# Altium PCB demo_board_routed_DDR.PcbDoc (part 2 of 2)
Units mil, origin at the board's own origin, x right, y up, seen from the top; angles counter-clockwise.
Board outline 6000 x 4000 mil, 4 copper layers (L1, L2, L3, L4), stack 64.6 mil thick; 2 components, 43 nets, 316 pads, 106 vias.
Unrouted connection lines stored in the file: 5.
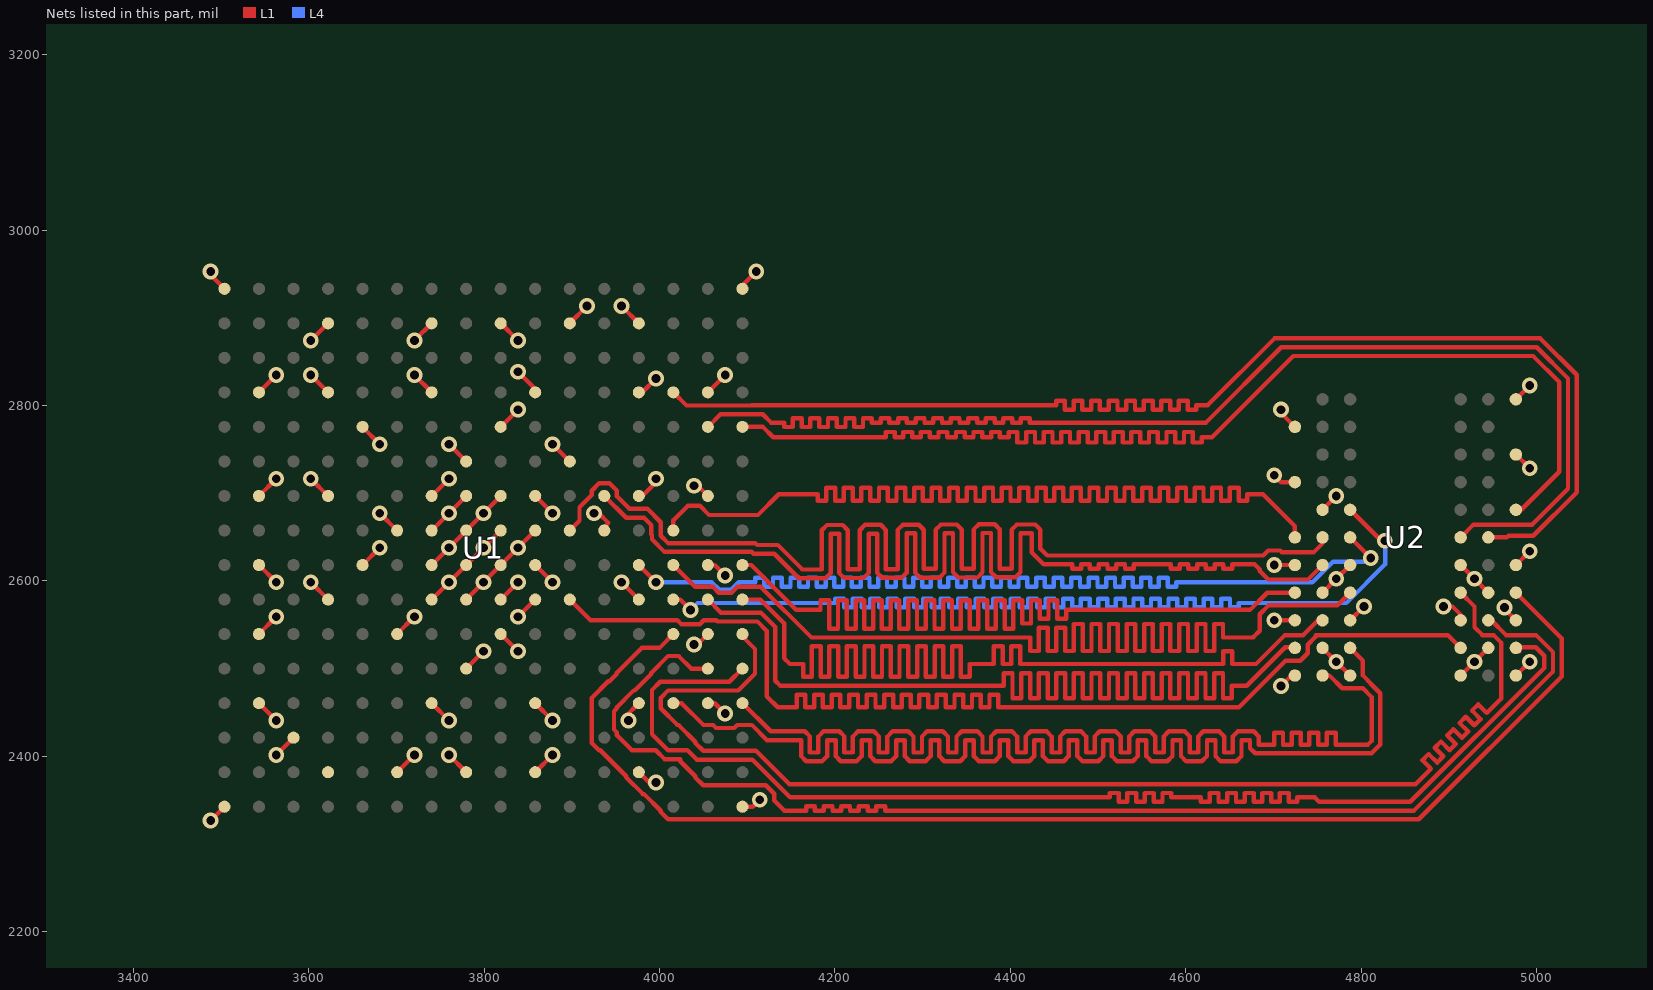
[diagram p4: the nets of this part, all layers, seen from the top]

## Via types
v1: diameter 18, hole 10, L1 to L4, 106 vias

## Nets (pads, with @x,y where several pads share a name; then routed paths per layer and width w, separated by ;. In a path a pad name is that pad's centre, name@x,y a point inside that pad or via, vN(x,y) a via of type N, cw(c..) or ccw(c..) an arc to the next point about the centre after c; other vN are vias at no path point) (continued)
BA2: U1.E16 U2.G1 | length 1504.4
  L1 w5: U1.E16@4094.49,2775.59 4117.82,2775.59 4129.63,2763.78 4243.11,2763.78 4248.03,2763.78 4258.03,2763.78 4258.03,2769.78 4268.03,2769.78 4268.03,2763.78 4278.03,2763.78 4278.03,2769.78 4288.03,2769.78 4288.03,2763.78 4298.03,2763.78 4298.03,2769.78 4308.03,2769.78 4308.03,2763.78 4318.03,2763.78 4318.03,2769.78 4328.03,2769.78 4328.03,2763.78 4338.03,2763.78 4338.03,2769.78 4348.03,2769.78 4348.03,2763.78 4358.03,2763.78 4358.03,2769.78 4368.03,2769.78 4368.03,2763.78 4378.03,2763.78 4378.03,2769.78 4388.03,2769.78 4388.03,2763.78 4398.03,2763.78 4398.03,2769.78 4408.03,2769.78 4408.03,2763.78 4408.03,2757.78 4418.03,2757.78 4418.03,2763.78 4418.03,2769.78 4428.03,2769.78 4428.03,2763.78 4428.03,2757.78 4438.03,2757.78 4438.03,2763.78 4438.03,2769.78 4448.03,2769.78 4448.03,2763.78 4448.03,2757.78 4458.03,2757.78 4458.03,2763.78 4458.03,2769.78 4468.03,2769.78 4468.03,2763.78 4468.03,2757.78 4478.03,2757.78 4478.03,2763.78 4478.03,2769.78 4488.03,2769.78 4488.03,2763.78 4488.03,2757.78 4498.03,2757.78 4498.03,2763.78 4498.03,2769.78 4508.03,2769.78 4508.03,2763.78 4508.03,2757.78 4518.03,2757.78 4518.03,2763.78 4518.03,2769.78 4528.03,2769.78 4528.03,2763.78 4528.03,2757.78 4538.03,2757.78 4538.03,2763.78 4538.03,2769.78 4548.03,2769.78 4548.03,2763.78 4548.03,2757.78 4558.03,2757.78 4558.03,2763.78 4558.03,2769.78 4568.03,2769.78 4568.03,2763.78 4568.03,2757.78 4578.03,2757.78 4578.03,2763.78 4578.03,2769.78 4588.03,2769.78 4588.03,2763.78 4588.03,2757.78 4598.03,2757.78 4598.03,2763.78 4598.03,2769.78 4608.03,2769.78 4608.03,2763.78 4608.03,2757.78 4618.03,2757.78 4618.03,2763.78 4623.03,2763.78 4629.92,2763.78 4722.6,2856.46 4995.98,2856.46 5025.75,2826.69 5025.75,2724.49 4982.36,2681.1 U2.G1@4976.38,2681.1
CAS#: U1.K14 U2.G7 | length 1379.2
  L1 w5: U1.K14@4015.75,2578.74 4023.61,2578.74 v1(4035.43,2566.92) ; U2.G7@4787.4,2681.1 4822.84,2645.66 v1(4826.76,2645.66)
  L4 w5: v1(4035.43,2566.92) 4043.3,2574.8 4126.97,2574.8 4200.35,2574.8 4200.35,2579.8 4210.35,2579.8 4210.35,2574.8 4210.35,2569.8 4220.35,2569.8 4220.35,2574.8 4220.35,2579.8 4230.35,2579.8 4230.35,2574.8 4230.35,2569.8 4240.35,2569.8 4240.35,2574.8 4240.35,2579.8 4250.35,2579.8 4250.35,2574.8 4250.35,2569.8 4260.35,2569.8 4260.35,2574.8 4260.35,2579.8 4270.35,2579.8 4270.35,2574.8 4270.35,2569.8 4280.35,2569.8 4280.35,2574.8 4280.35,2579.8 4290.35,2579.8 4290.35,2574.8 4290.35,2569.8 4300.35,2569.8 4300.35,2574.8 4300.35,2579.8 4310.35,2579.8 4310.35,2574.8 4310.35,2569.8 4320.35,2569.8 4320.35,2574.8 4320.35,2579.8 4330.35,2579.8 4330.35,2574.8 4330.35,2569.8 4340.35,2569.8 4340.35,2574.8 4340.35,2579.8 4350.35,2579.8 4350.35,2574.8 4350.35,2569.8 4360.35,2569.8 4360.35,2574.8 4360.35,2579.8 4370.35,2579.8 4370.35,2574.8 4370.35,2569.8 4380.35,2569.8 4380.35,2574.8 4380.35,2579.8 4390.35,2579.8 4390.35,2574.8 4390.35,2569.8 4400.35,2569.8 4400.35,2574.8 4400.35,2579.8 4410.35,2579.8 4410.35,2574.8 4410.35,2569.8 4420.35,2569.8 4420.35,2574.8 4420.35,2579.8 4430.35,2579.8 4430.35,2574.8 4430.35,2569.8 4440.35,2569.8 4440.35,2574.8 4440.35,2579.8 4450.35,2579.8 4450.35,2574.8 4450.35,2569.8 4460.35,2569.8 4460.35,2574.8 4460.35,2579.8 4470.35,2579.8 4470.35,2574.8 4470.35,2569.8 4480.35,2569.8 4480.35,2574.8 4480.35,2579.8 4490.35,2579.8 4490.35,2574.8 4490.35,2569.8 4500.35,2569.8 4500.35,2574.8 4500.35,2579.8 4510.35,2579.8 4510.35,2574.8 4510.35,2569.8 4520.35,2569.8 4520.35,2574.8 4520.35,2579.8 4530.35,2579.8 4530.35,2574.8 4530.35,2569.8 4540.35,2569.8 4540.35,2574.8 4540.35,2579.8 4550.35,2579.8 4550.35,2574.8 4550.35,2569.8 4560.35,2569.8 4560.35,2574.8 4560.35,2579.8 4570.35,2579.8 4570.35,2574.8 4570.35,2569.8 4580.35,2569.8 4580.35,2574.8 4580.35,2579.8 4590.35,2579.8 4590.35,2574.8 4590.35,2569.8 4600.35,2569.8 4600.35,2574.8 4600.35,2579.8 4610.35,2579.8 4610.35,2574.8 4610.35,2569.8 4620.35,2569.8 4620.35,2574.8 4620.35,2579.8 4630.35,2579.8 4630.35,2574.8 4630.35,2569.8 4640.35,2569.8 4640.35,2574.8 4640.35,2579.8 4650.35,2579.8 4650.35,2574.8 4650.35,2569.8 4660.35,2569.8 4660.35,2574.8 4665.35,2574.8 4783.17,2574.8 4827.51,2619.14 4827.51,2644.91 v1(4826.76,2645.66)
CK_N: U1.H11 U2.F8 | length 1505.1
  L1 w5: U1.H11@3897.64,2657.48 3908.7,2668.54 3908.7,2684 3922.62,2697.92 3922.62,2702.81 3931.05,2711.24 3942.97,2711.24 3951.4,2702.81 3951.4,2696.6 3965.54,2682.46 3985.89,2682.46 4001.36,2666.99 4001.36,2651.52 4009.79,2643.09 4109.15,2643.09 4111.27,2640.97 4134.94,2640.97 4162.86,2613.05 4185.04,2613.05 4185.04,2657.48 ; 4184.83,2657.69 4190.9,2663.75 4208.87,2663.75 4214.72,2657.89 4214.72,2613.26 4228.35,2613.26 4228.35,2657.69 ; 4228.14,2657.89 4234.2,2663.95 4252.17,2663.95 4258.03,2658.1 4258.03,2613.46 4271.65,2613.46 4271.65,2657.89 ; 4271.45,2658.1 4277.51,2664.16 4295.48,2664.16 4301.34,2658.3 4301.34,2613.67 4314.96,2613.67 4314.96,2658.1 ; 4314.76,2658.3 4320.82,2664.36 4338.79,2664.36 4344.65,2658.51 4344.65,2613.87 4358.27,2613.87 4358.27,2658.3 ; 4358.06,2658.51 4364.13,2664.57 4382.09,2664.57 4387.95,2658.71 4387.95,2614.08 4401.57,2614.08 4401.57,2658.5 4407.43,2664.36 4428.35,2664.36 4434.21,2658.51 4434.21,2636.81 4442.05,2628.97 4688.32,2628.97 4693.95,2634.61 4707.62,2634.61 4709.36,2632.87 4746.06,2632.87 4755.91,2642.72 U2.F8@4755.91,2649.61
CK_P: U1.G12 U2.E8 | length 1506.7
  L1 w5: U1.G12@3937.01,2696.85 3961.99,2671.87 3982.34,2671.87 3990.77,2663.44 3990.77,2653.11 3991.36,2652.52 3991.36,2647.38 4005.65,2633.09 4105.01,2633.09 4107.13,2630.97 4130.8,2630.97 4158.72,2603.05 4189.18,2603.05 4195.04,2608.91 4195.04,2653.54 ; 4195.04,2653.75 4204.72,2653.75 4204.72,2609.11 4210.58,2603.26 4232.49,2603.26 4238.35,2609.11 4238.35,2653.75 ; 4238.35,2653.95 4248.03,2653.95 4248.03,2609.32 4253.89,2603.46 4275.8,2603.46 4281.65,2609.32 4281.65,2653.95 ; 4281.65,2654.16 4291.34,2654.16 4291.34,2609.52 4297.2,2603.67 4319.1,2603.67 4324.96,2609.52 4324.96,2654.16 ; 4324.96,2654.36 4334.65,2654.36 4334.65,2609.73 4340.5,2603.87 4362.41,2603.87 4368.27,2609.73 4368.27,2654.36 ; 4368.27,2654.57 4377.95,2654.57 4377.95,2609.93 4383.81,2604.08 4405.76,2604.08 4411.58,2609.89 4411.58,2654.36 4424.21,2654.36 4424.21,2632.67 4437.91,2618.97 4455.71,2618.97 4460.71,2618.97 4470.71,2618.97 4470.71,2613.97 4480.71,2613.97 4480.71,2618.97 4490.71,2618.97 4490.71,2613.97 4500.71,2613.97 4500.71,2618.97 4510.71,2618.97 4510.71,2613.97 4520.71,2613.97 4520.71,2618.97 4530.71,2618.97 4530.71,2613.97 4540.71,2613.97 4540.71,2618.97 4550.71,2618.97 4560.71,2618.97 4567.91,2618.97 4572.91,2618.97 4582.91,2618.97 4582.91,2613.97 4592.91,2613.97 4592.91,2618.97 4602.91,2618.97 4602.91,2613.97 4612.91,2613.97 4612.91,2618.97 4622.91,2618.97 4622.91,2613.97 4632.91,2613.97 4632.91,2618.97 4642.91,2618.97 4642.91,2613.97 4652.91,2613.97 4652.91,2618.97 4656.5,2618.97 4678.32,2618.97 4684.29,2613 4684.29,2611.28 4693.95,2601.61 4739.4,2601.61 U2.E8@4755.91,2618.11
CKE: U1.D14 U2.F2 | length 1501.3
  L1 w5: U1.D14@4015.75,2814.96 4030.73,2799.98 4105.1,2799.98 4105.31,2800.2 4446.85,2800.2 4452.13,2800.2 4452.13,2805.2 4462.13,2805.2 4462.13,2800.2 4462.13,2795.2 4472.13,2795.2 4472.13,2800.2 4472.13,2805.2 4482.13,2805.2 4482.13,2800.2 4482.13,2795.2 4492.13,2795.2 4492.13,2800.2 4492.13,2805.2 4502.13,2805.2 4502.13,2800.2 4502.13,2795.2 4512.13,2795.2 4512.13,2800.2 4512.13,2805.2 4522.13,2805.2 4522.13,2800.2 4522.13,2795.2 4532.13,2795.2 4532.13,2800.2 4532.13,2805.2 4542.13,2805.2 4542.13,2800.2 4542.13,2795.2 4552.13,2795.2 4552.13,2800.2 4552.13,2805.2 4562.13,2805.2 4562.13,2800.2 4562.13,2795.2 4572.13,2795.2 4572.13,2800.2 4572.13,2805.2 4582.13,2805.2 4582.13,2800.2 4582.13,2795.2 4592.13,2795.2 4592.13,2800.2 4592.13,2805.2 4602.13,2805.2 4602.13,2800.2 4602.13,2795.2 4612.13,2795.2 4612.13,2800.2 4617.13,2800.2 4624.84,2800.2 4701.1,2876.46 5004.26,2876.46 5045.75,2834.97 5045.75,2700.9 4996.27,2651.42 4967.98,2651.42 4966.17,2649.61 U2.F2@4944.88,2649.61
DM/RDQS: U1.K11 U2.B3 | length 1503.7
  L1 w5: U1.K11@3897.64,2578.74 3921.26,2555.12 4020.35,2555.12 4025.04,2550.42 4045.82,2550.42 4050.52,2555.12 4064.6,2555.12 4065.96,2553.76 4111.59,2553.76 4122.05,2543.31 4122.05,2468.5 4134.65,2455.9 4145.67,2455.9 4156.26,2455.9 4156.26,2470.17 4166.26,2470.17 4166.26,2455.9 4176.26,2455.9 4176.26,2470.17 4186.26,2470.17 4186.26,2455.9 4196.26,2455.9 4196.26,2470.17 4206.26,2470.17 4206.26,2455.9 4216.26,2455.9 4216.26,2470.17 4226.26,2470.17 4226.26,2455.9 4236.26,2455.9 4236.26,2470.17 4246.26,2470.17 4246.26,2455.9 4256.26,2455.9 4256.26,2470.17 4266.26,2470.17 4266.26,2455.9 4276.26,2455.9 4276.26,2470.17 4286.26,2470.17 4286.26,2455.9 4296.26,2455.9 4296.26,2470.17 4306.26,2470.17 4306.26,2455.9 4316.26,2455.9 4316.26,2470.17 4326.26,2470.17 4326.26,2455.9 4336.26,2455.9 4336.26,2470.17 4346.26,2470.17 4346.26,2455.9 4356.26,2455.9 4356.26,2470.17 4366.26,2470.17 4366.26,2455.9 4376.26,2455.9 4376.26,2470.17 4386.26,2470.17 4386.26,2455.9 4396.26,2455.9 4406.26,2455.9 4416.26,2455.9 4421.26,2455.9 4503.94,2455.9 4660.63,2455.9 4713.76,2509.04 4730.45,2509.04 4739,2517.58 4739,2527.34 4748.03,2536.38 4748.03,2538.21 4898.8,2538.21 U2.B3@4913.39,2523.62
DQ0: U1.L14 U2.D1 | length 1503.7
  L1 w5: U1.L14@4015.75,2539.37 4000,2523.62 3979.65,2523.62 3951.4,2495.37 3951.4,2494.04 3942.97,2485.61 3941.64,2485.61 3922.62,2466.59 3922.62,2415.3 3931.05,2406.87 3932.38,2406.87 3961.99,2377.26 3961.99,2375.93 3981.01,2356.91 3982.34,2356.91 4001.36,2337.89 4001.36,2336.56 4009.79,2328.13 4865.69,2328.13 5028.63,2491.07 5028.63,2534.37 U2.D1@4976.38,2586.61
DQ1: U1.L16 U2.D3 | length 1503.7
  L1 w5: U1.L16@4094.49,2539.37 4097.59,2536.27 4096.3,2534.97 4108.88,2522.39 4108.88,2494.04 4089.86,2475.02 4009.79,2475.02 4001.36,2466.59 4001.36,2454.67 4020.38,2435.65 4021.71,2435.65 4040.73,2416.63 4040.73,2415.3 4049.75,2406.28 4109.91,2406.28 4148.06,2368.13 4861.86,2368.13 4865.4,2371.67 4872.47,2378.74 4879.54,2385.81 4869.79,2395.56 4876.86,2402.63 4886.61,2392.88 4893.68,2399.95 4883.93,2409.7 4891,2416.77 4900.75,2407.02 4907.82,2414.09 4898.07,2423.84 4905.14,2430.92 4914.9,2421.16 4921.97,2428.23 4912.21,2437.99 4919.28,2445.06 4929.04,2435.31 4936.11,2442.38 4926.36,2452.13 4933.43,2459.2 4943.18,2449.45 4959.47,2465.74 4959.47,2529.66 4950.92,2538.21 4938.17,2538.21 4929.13,2547.24 4929.13,2570.87 U2.D3@4913.39,2586.61
DQ2: U1.M15 U2.C2 | length 1505.6
  L1 w5: U1.M15@4055.12,2500 4036.1,2500 4021.71,2514.39 4009.79,2514.39 3990.77,2495.37 3990.77,2494.04 3971.75,2475.02 3970.42,2475.02 3951.4,2456 3951.4,2454.67 3948.06,2451.33 3948.06,2430.56 3951.4,2427.22 3951.4,2423.98 3968.5,2406.87 3995.65,2406.87 4005.65,2396.87 4023.62,2396.87 4023.62,2394.37 4040.73,2377.26 4040.73,2375.93 4049.75,2366.91 4094.49,2366.91 4099.49,2366.91 4109.49,2366.91 4120.99,2366.91 4130.67,2357.23 4130.67,2349.64 4142.18,2338.13 4147.18,2338.13 4157.18,2338.13 4167.18,2338.13 4167.18,2343.13 4177.18,2343.13 4177.18,2338.13 4187.18,2338.13 4187.18,2343.13 4197.18,2343.13 4197.18,2338.13 4207.18,2338.13 4207.18,2343.13 4217.18,2343.13 4217.18,2338.13 4227.18,2338.13 4227.18,2343.13 4237.18,2343.13 4237.18,2338.13 4247.18,2338.13 4247.18,2343.13 4257.18,2343.13 4257.18,2338.13 4374.02,2338.13 4860.15,2338.13 5018.63,2496.61 5018.63,2518.85 4999.27,2538.21 4965.07,2538.21 4948.16,2555.12 U2.C2@4944.88,2555.12
DQ3: U1.M16 U2.B1 | length 1512.3
  L1 w5: U1.M16@4094.49,2500 4079.51,2485.02 4000.77,2485.02 3991.36,2475.61 3991.36,2425.3 4009.79,2406.87 4031.74,2406.87 4042.33,2396.28 4105.76,2396.28 4148.91,2353.13 4401.57,2353.13 4513.43,2353.13 4513.43,2358.13 4523.43,2358.13 4523.43,2353.13 4523.43,2348.13 4533.43,2348.13 4533.43,2353.13 4533.43,2358.13 4543.43,2358.13 4543.43,2353.13 4543.43,2348.13 4553.43,2348.13 4553.43,2353.13 4553.43,2358.13 4563.43,2358.13 4563.43,2353.13 4563.43,2348.13 4573.43,2348.13 4573.43,2353.13 4573.43,2358.13 4583.43,2358.13 4583.43,2353.13 4593.43,2353.13 4598.43,2353.13 4607.28,2353.13 4617.28,2353.13 4617.28,2348.13 4627.28,2348.13 4627.28,2353.13 4627.28,2358.13 4637.28,2358.13 4637.28,2353.13 4637.28,2348.13 4647.28,2348.13 4647.28,2353.13 4647.28,2358.13 4657.28,2358.13 4657.28,2353.13 4657.28,2348.13 4667.28,2348.13 4667.28,2353.13 4667.28,2358.13 4677.28,2358.13 4677.28,2353.13 4677.28,2348.13 4687.28,2348.13 4687.28,2353.13 4687.28,2358.13 4697.28,2358.13 4697.28,2353.13 4697.28,2348.13 4707.28,2348.13 4707.28,2353.13 4707.28,2358.13 4717.28,2358.13 4717.28,2353.13 4717.28,2348.13 4727.28,2348.13 4727.28,2353.13 4732.28,2353.13 4746.97,2353.13 4751.97,2348.13 4856,2348.13 5008.63,2500.75 5008.63,2514.71 4998.96,2524.37 4977.13,2524.37 U2.B1@4976.38,2523.62 U2.B1@4980.46,2519.54
DQ4: U1.J14 U2.D7 | length 1503.7
  L1 w5: U1.J14@4015.75,2618.11 4040.73,2593.13 4061.08,2593.13 4067.59,2586.61 4082.01,2586.61 4088.53,2593.13 4115.53,2593.13 4173.23,2535.43 4370.08,2535.43 4377.95,2535.43 4422.48,2535.43 4422.48,2520.06 4432.48,2520.06 4432.48,2535.43 4432.48,2546.76 4442.48,2546.76 4442.48,2535.43 4442.48,2520.06 4452.48,2520.06 4452.48,2535.43 4452.48,2546.59 4462.48,2546.59 4462.48,2535.43 4462.48,2520.06 4472.48,2520.06 4472.48,2535.43 4472.48,2550.81 4482.48,2550.81 4482.48,2535.43 4482.48,2520.06 4492.48,2520.06 4492.48,2535.43 4492.48,2550.81 4502.48,2550.81 4502.48,2535.43 4502.48,2520.06 4512.48,2520.06 4512.48,2535.43 4512.48,2550.81 4522.48,2550.81 4522.48,2535.43 4522.48,2520.06 4532.48,2520.06 4532.48,2535.43 4532.48,2550.81 4542.48,2550.81 4542.48,2535.43 4542.48,2520.06 4552.48,2520.06 4552.48,2535.43 4552.48,2550.81 4562.48,2550.81 4562.48,2535.43 4562.48,2520.06 4572.48,2520.06 4572.48,2535.43 4572.48,2550.8 4582.48,2550.8 4582.48,2535.43 4582.48,2520.06 4592.48,2520.06 4592.48,2535.43 4592.48,2550.8 4602.48,2550.8 4602.48,2535.43 4602.48,2520.06 4612.48,2520.06 4612.48,2535.43 4612.48,2550.8 4622.48,2550.8 4622.48,2535.43 4622.48,2520.06 4632.48,2520.06 4632.48,2535.43 4632.48,2550.8 4642.48,2550.8 4642.48,2535.43 4652.48,2535.43 4657.48,2535.43 4677.17,2535.43 4677.17,2536.19 4684.29,2543.31 4684.29,2561.95 4694.36,2572.03 4772.81,2572.03 U2.D7@4787.4,2586.61
DQ5: U1.J16 U2.D9 | length 1503.7
  L1 w5: U1.J16@4094.49,2618.11 4104.69,2618.11 4155.87,2566.93 4169.29,2566.93 4183.5,2566.93 4183.5,2577.83 4193.5,2577.83 4193.5,2566.93 4193.5,2545.66 4203.5,2545.66 4203.5,2566.93 4203.5,2577.83 4213.5,2577.83 4213.5,2566.93 4213.5,2545.66 4223.5,2545.66 4223.5,2566.93 4223.5,2577.83 4233.5,2577.83 4233.5,2566.93 4233.5,2545.66 4243.5,2545.66 4243.5,2566.93 4243.5,2577.83 4253.5,2577.83 4253.5,2566.93 4253.5,2545.66 4263.5,2545.66 4263.5,2566.93 4263.5,2577.83 4273.5,2577.83 4273.5,2566.93 4273.5,2545.66 4283.5,2545.66 4283.5,2566.93 4283.5,2577.83 4293.5,2577.83 4293.5,2566.93 4293.5,2545.66 4303.5,2545.66 4303.5,2566.93 4303.5,2577.83 4313.5,2577.83 4313.5,2566.93 4313.5,2545.66 4323.5,2545.66 4323.5,2566.93 4323.5,2577.83 4333.5,2577.83 4333.5,2566.93 4333.5,2545.66 4343.5,2545.66 4343.5,2566.93 4343.5,2577.83 4353.5,2577.83 4353.5,2566.93 4353.5,2545.66 4363.5,2545.66 4363.5,2566.93 4363.5,2577.83 4373.5,2577.83 4373.5,2566.93 4373.5,2545.66 4383.5,2545.66 4383.5,2566.93 4383.5,2577.83 4393.5,2577.83 4393.5,2566.93 4393.5,2545.66 4403.5,2545.66 4403.5,2566.93 4403.5,2577.83 4413.5,2577.83 4413.5,2566.93 4413.5,2551.39 4423.5,2551.39 4423.5,2566.93 4423.5,2577.83 4433.5,2577.83 4433.5,2566.93 4433.5,2556.93 4443.5,2556.93 4443.5,2566.93 4443.5,2577.83 4453.5,2577.83 4453.5,2566.93 4453.5,2556.82 4463.5,2556.82 4463.5,2566.93 4468.5,2566.93 4539.37,2566.93 4673.23,2566.93 4692.91,2586.61 U2.D9@4724.41,2586.61
DQ6: U1.K15 U2.B9 | length 1503.7
  L1 w5: U1.K15@4055.12,2578.74 4070.1,2563.76 4115.74,2563.76 4132.05,2547.45 4132.05,2486.06 4137.8,2480.32 4138.01,2480.53 4351.14,2480.53 4392.48,2480.53 4392.48,2494.77 4402.48,2494.77 4402.48,2480.53 4402.48,2466.34 4412.48,2466.34 4412.48,2480.53 4412.48,2494.77 4422.48,2494.77 4422.48,2480.53 4422.48,2466.34 4432.48,2466.34 4432.48,2480.53 4432.48,2494.77 4442.48,2494.77 4442.48,2480.53 4442.48,2466.34 4452.48,2466.34 4452.48,2480.53 4452.48,2494.77 4462.48,2494.77 4462.48,2480.53 4462.48,2466.34 4472.48,2466.34 4472.48,2480.53 4472.48,2494.77 4482.48,2494.77 4482.48,2480.53 4482.48,2466.34 4492.48,2466.34 4492.48,2480.53 4492.48,2494.77 4502.48,2494.77 4502.48,2480.53 4502.48,2466.34 4512.48,2466.34 4512.48,2480.53 4512.48,2494.77 4522.48,2494.77 4522.48,2480.53 4522.48,2466.34 4532.48,2466.34 4532.48,2480.53 4532.48,2494.77 4542.48,2494.77 4542.48,2480.53 4542.48,2466.34 4552.48,2466.34 4552.48,2480.53 4552.48,2494.77 4562.48,2494.77 4562.48,2480.53 4562.48,2466.34 4572.48,2466.34 4572.48,2480.53 4572.48,2494.77 4582.48,2494.77 4582.48,2480.53 4582.48,2466.34 4592.48,2466.34 4592.48,2480.53 4592.48,2494.77 4602.48,2494.77 4602.48,2480.53 4602.48,2466.34 4612.48,2466.34 4612.48,2480.53 4612.48,2494.77 4622.48,2494.77 4622.48,2480.53 4622.48,2466.34 4632.48,2466.34 4632.48,2480.53 4632.48,2494.77 4642.48,2494.77 4642.48,2480.53 4642.48,2466.34 4652.48,2466.34 4652.48,2480.53 4657.48,2480.53 4665.35,2480.53 4669.5,2480.53 4713.35,2524.37 4723.66,2524.37 U2.B9@4724.41,2523.62
DQ7: U1.K16 U2.C8 | length 1503.7
  L1 w5: U1.K16@4094.49,2578.74 4114.9,2578.74 4142.05,2551.59 4142.05,2511.81 4148.65,2505.21 4153.65,2505.21 4163.65,2505.21 4163.65,2490.53 4173.65,2490.53 4173.65,2505.21 4173.65,2525.43 4183.65,2525.43 4183.65,2505.21 4183.65,2490.53 4193.65,2490.53 4193.65,2505.21 4193.65,2525.43 4203.65,2525.43 4203.65,2505.21 4203.65,2490.53 4213.65,2490.53 4213.65,2505.21 4213.65,2525.43 4223.65,2525.43 4223.65,2505.21 4223.65,2490.53 4233.65,2490.53 4233.65,2505.21 4233.65,2525.43 4243.65,2525.43 4243.65,2505.21 4243.65,2490.53 4253.65,2490.53 4253.65,2505.21 4253.65,2525.43 4263.65,2525.43 4263.65,2505.21 4263.65,2490.53 4273.65,2490.53 4273.65,2505.21 4273.65,2525.43 4283.65,2525.43 4283.65,2505.21 4283.65,2490.53 4293.65,2490.53 4293.65,2505.21 4293.65,2525.43 4303.65,2525.43 4303.65,2505.21 4303.65,2490.53 4313.65,2490.53 4313.65,2505.21 4313.65,2525.43 4323.65,2525.43 4323.65,2505.21 4323.65,2490.53 4333.65,2490.53 4333.65,2505.21 4333.65,2525.43 4343.65,2525.43 4343.65,2505.21 4343.65,2490.53 4353.65,2490.53 4353.65,2505.21 4363.65,2505.21 4366.14,2505.21 4371.14,2505.21 4381.14,2505.21 4381.14,2525.43 4391.14,2525.43 4391.14,2505.21 4401.14,2505.21 4401.14,2525.43 4411.14,2525.43 4411.14,2505.21 4421.14,2505.21 4431.14,2505.21 4441.14,2505.21 4451.14,2505.21 4461.14,2505.21 4471.14,2505.21 4481.14,2505.21 4491.14,2505.21 4492.13,2505.21 4637.8,2505.21 4642.8,2505.21 4642.8,2519.82 4652.8,2519.82 4652.8,2505.21 4680.05,2505.21 4713.04,2538.21 4733.89,2538.21 4750.8,2555.12 U2.C8@4755.91,2555.12
DQS_N: U1.N16 U2.A8 | length 1503.7
  L1 w5: U1.N16@4094.49,2460.63 4126.67,2428.44 4165.56,2428.44 4171.42,2422.59 4171.42,2404.39 4181.1,2404.39 4181.1,2422.59 4186.96,2428.44 4204.93,2428.44 4210.79,2422.59 4210.79,2404.39 4220.47,2404.39 4220.47,2422.59 4226.33,2428.44 4244.3,2428.44 4250.16,2422.59 4250.16,2404.39 4259.84,2404.39 4259.84,2422.59 4265.7,2428.44 4283.67,2428.44 4289.53,2422.59 4289.53,2404.39 4299.21,2404.39 4299.21,2422.59 4305.07,2428.44 4323.04,2428.44 4328.9,2422.59 4328.9,2404.39 4338.58,2404.39 4338.58,2422.59 4344.44,2428.44 4362.41,2428.44 4368.27,2422.59 4368.27,2404.39 4377.95,2404.39 4377.95,2422.59 4383.81,2428.44 4401.78,2428.44 4407.64,2422.59 4407.64,2404.39 4417.32,2404.39 4417.32,2422.59 4423.18,2428.44 4441.15,2428.44 4447.01,2422.59 4447.01,2404.39 4456.69,2404.39 4456.69,2422.59 4462.55,2428.44 4480.52,2428.44 4486.38,2422.59 4486.38,2404.39 4496.06,2404.39 4496.06,2422.59 4501.92,2428.44 4519.89,2428.44 4525.75,2422.59 4525.75,2404.39 4535.43,2404.39 4535.43,2422.59 4541.29,2428.44 4559.26,2428.44 4565.12,2422.59 4565.12,2404.39 4574.8,2404.39 4574.8,2422.59 4580.66,2428.44 4598.63,2428.44 4604.49,2422.59 4604.49,2404.39 4614.17,2404.39 4614.17,2422.59 4620.03,2428.44 4638,2428.44 4643.86,2422.59 4643.86,2404.39 4653.54,2404.39 4653.54,2422.59 4659.4,2428.44 4677.37,2428.44 4683.23,2422.59 4683.23,2413.39 4695.87,2413.39 4700.87,2413.39 4700.87,2426.79 4710.87,2426.79 4710.87,2413.39 4720.87,2413.39 4720.87,2426.79 4730.87,2426.79 4730.87,2413.39 4740.87,2413.39 4740.87,2426.79 4750.87,2426.79 4750.87,2413.39 4760.87,2413.39 4760.87,2426.79 4770.87,2426.79 4770.87,2413.39 4779.53,2413.39 4807.71,2413.39 4811.85,2417.53 4811.85,2467.68 4801.99,2477.54 4778.37,2477.54 4763.78,2492.13 U2.A8@4755.91,2492.13
DQS_P: U1.N14 U2.B7 | length 1502.8
  L1 w5: U1.N14@4015.75,2460.63 4025.14,2460.63 4050.12,2435.65 4061.08,2435.65 4064.41,2432.31 4085.19,2432.31 4088.53,2435.65 4105.33,2435.65 4122.53,2418.44 4161.42,2418.44 4161.42,2400.25 4167.28,2394.39 4185.24,2394.39 4191.1,2400.25 4191.1,2418.44 4200.79,2418.44 4200.79,2400.25 4206.65,2394.39 4224.61,2394.39 4230.47,2400.25 4230.47,2418.44 4240.16,2418.44 4240.16,2400.25 4246.02,2394.39 4263.98,2394.39 4269.84,2400.25 4269.84,2418.44 4279.53,2418.44 4279.53,2400.25 4285.39,2394.39 4303.35,2394.39 4309.21,2400.25 4309.21,2418.44 4318.9,2418.44 4318.9,2400.25 4324.76,2394.39 4342.72,2394.39 4348.58,2400.25 4348.58,2418.44 4358.27,2418.44 4358.27,2400.25 4364.13,2394.39 4382.09,2394.39 4387.95,2400.25 4387.95,2418.44 4397.64,2418.44 4397.64,2400.25 4403.5,2394.39 4421.46,2394.39 4427.32,2400.25 4427.32,2418.44 4437.01,2418.44 4437.01,2400.25 4442.87,2394.39 4460.83,2394.39 4466.69,2400.25 4466.69,2418.44 4476.38,2418.44 4476.38,2400.25 4482.24,2394.39 4500.2,2394.39 4506.06,2400.25 4506.06,2418.44 4515.75,2418.44 4515.75,2400.25 4521.61,2394.39 4539.57,2394.39 4545.43,2400.25 4545.43,2418.44 4555.12,2418.44 4555.12,2400.25 4560.98,2394.39 4578.94,2394.39 4584.8,2400.25 4584.8,2418.44 4594.49,2418.44 4594.49,2400.25 4600.35,2394.39 4618.31,2394.39 4624.17,2400.25 4624.17,2418.44 4633.86,2418.44 4633.86,2400.25 4639.72,2394.39 4657.68,2394.39 4663.54,2400.25 4663.54,2418.44 4673.23,2418.44 4673.23,2409.24 4679.09,2403.39 4811.85,2403.39 4821.85,2413.39 4821.85,2471.82 4811.02,2482.65 4811.02,2483.09 4801.99,2492.13 4801.99,2509.04 U2.B7@4787.4,2523.62
GND: U1.A1 U1.A16 U1.B7 U1.B11 U1.D4 U1.D13 U1.E9 U1.G2 U1.G8 U1.G15 U1.H7 U1.H9 U1.H12 U1.J5 U1.J8 U1.K7 U1.K9 U1.L2 U1.L15 U1.M8 U1.N13 U1.P3 U1.R6 U1.R10 U1.T1 U1.T16 U2.A3 U2.A7 U2.B2 U2.B8 U2.D2 U2.D8 U2.E3 U2.E7 U2.G8 U2.J1 U2.K9 | length 986.2
  L1 w5: v1(3488.19,2326.77) U1.T1@3503.94,2342.52 ; v1(3488.19,2952.76) 3488.19,2948.82 U1.A1@3503.94,2933.07 ; U1.L2@3543.31,2539.37 v1(3562.99,2559.06) ; U1.G2@3543.31,2696.85 v1(3562.99,2716.54) ; v1(3562.99,2401.57) U1.P3@3582.68,2421.26 ; v1(3602.36,2834.65) U1.D4@3622.05,2814.96 ; U1.J5@3661.42,2618.11 v1(3681.1,2637.8) ; U1.R6@3700.79,2381.89 v1(3720.47,2401.57) ; v1(3720.47,2874.02) U1.B7@3740.16,2893.7 ; U1.K7@3740.16,2578.74 v1(3759.84,2598.43) ; U1.H7@3740.16,2657.48 v1(3759.84,2677.17) U1.G8@3779.53,2696.85 ; v1(3759.84,2598.43) U1.J8@3779.53,2618.11 v1(3799.21,2637.8) U1.H9@3818.9,2657.48 ; U1.M8@3779.53,2500 v1(3799.21,2519.68) ; U1.K9@3818.9,2578.74 v1(3838.58,2598.43) ; U1.E9@3818.9,2775.59 v1(3838.58,2795.28) ; U1.R10@3858.27,2381.89 v1(3877.95,2401.57) ; U1.B11@3897.64,2893.7 v1(3917.32,2913.39) ; v1(3925.2,2677.17) 3930.6,2677.17 3941.68,2666.09 3937.01,2661.42 U1.H12@3937.01,2657.48 ; v1(3964.56,2440.94) 3960.62,2444.88 U1.N13@3976.38,2460.63 ; U1.D13@3976.38,2814.96 3980.31,2814.96 v1(3996.06,2830.71) ; v1(4039.18,2708.47) 4039.18,2712.42 4039.36,2712.61 U1.G15@4055.12,2696.85 ; v1(4039.36,2527.55) 4039.36,2523.99 4039.18,2523.81 4039.37,2523.62 U1.L15@4055.12,2539.37 ; U1.T16@4094.49,2342.52 4106.3,2342.52 v1(4114.17,2350.39) ; U1.A16@4094.49,2933.07 4094.49,2937.01 v1(4110.24,2952.76) ; v1(4708.66,2795.28) 4708.66,2791.34 U2.K9@4724.41,2775.59 ; U2.B8@4755.91,2523.62 v1(4771.65,2507.87) U2.A7@4787.4,2492.13 ; U2.D8@4755.91,2586.61 v1(4771.65,2602.36) U2.E7@4787.4,2618.11 ; U2.G8@4755.91,2681.1 v1(4771.65,2696.85) ; U2.A3@4913.39,2492.13 v1(4929.13,2507.87) U2.B2@4944.88,2523.62 ; U2.E3@4913.39,2618.11 v1(4929.13,2602.36) U2.D2@4944.88,2586.61 ; U2.J1@4976.38,2744.09 v1(4992.13,2728.35)
ODT: U1.H14 U2.F9 | length 1504
  L1 w5: U1.H14@4015.75,2657.48 4015.75,2669.01 4032.35,2685.6 4046.01,2685.6 4056.42,2675.2 4112.2,2675.2 4135.83,2698.82 4172.24,2698.82 4180.2,2698.82 4180.2,2691.32 4190.2,2691.32 4190.2,2698.82 4190.2,2706.32 4200.2,2706.32 4200.2,2698.82 4200.2,2691.32 4210.2,2691.32 4210.2,2698.82 4210.2,2706.32 4220.2,2706.32 4220.2,2698.82 4220.2,2691.32 4230.2,2691.32 4230.2,2698.82 4230.2,2706.32 4240.2,2706.32 4240.2,2698.82 4240.2,2691.32 4250.2,2691.32 4250.2,2698.82 4250.2,2706.32 4260.2,2706.32 4260.2,2698.82 4260.2,2691.32 4270.2,2691.32 4270.2,2698.82 4270.2,2706.32 4280.2,2706.32 4280.2,2698.82 4280.2,2691.32 4290.2,2691.32 4290.2,2698.82 4290.2,2706.32 4300.2,2706.32 4300.2,2698.82 4300.2,2691.32 4310.2,2691.32 4310.2,2698.82 4310.2,2706.32 4320.2,2706.32 4320.2,2698.82 4320.2,2691.32 4330.2,2691.32 4330.2,2698.82 4330.2,2706.32 4340.2,2706.32 4340.2,2698.82 4340.2,2691.32 4350.2,2691.32 4350.2,2698.82 4350.2,2706.32 4360.2,2706.32 4360.2,2698.82 4360.2,2691.32 4370.2,2691.32 4370.2,2698.82 4370.2,2706.32 4380.2,2706.32 4380.2,2698.82 4380.2,2691.32 4390.2,2691.32 4390.2,2698.82 4390.2,2706.32 4400.2,2706.32 4400.2,2698.82 4400.2,2691.32 4410.2,2691.32 4410.2,2698.82 4410.2,2706.32 4420.2,2706.32 4420.2,2698.82 4420.2,2691.32 4430.2,2691.32 4430.2,2698.82 4430.2,2706.32 4440.2,2706.32 4440.2,2698.82 4440.2,2691.32 4450.2,2691.32 4450.2,2698.82 4450.2,2706.32 4460.2,2706.32 4460.2,2698.82 4460.2,2691.32 4470.2,2691.32 4470.2,2698.82 4470.2,2706.32 4480.2,2706.32 4480.2,2698.82 4480.2,2691.32 4490.2,2691.32 4490.2,2698.82 4490.2,2706.32 4500.2,2706.32 4500.2,2698.82 4500.2,2691.32 4510.2,2691.32 4510.2,2698.82 4510.2,2706.32 4520.2,2706.32 4520.2,2698.82 4520.2,2691.32 4530.2,2691.32 4530.2,2698.82 4530.2,2706.32 4540.2,2706.32 4540.2,2698.82 4540.2,2691.32 4550.2,2691.32 4550.2,2698.82 4550.2,2706.32 4560.2,2706.32 4560.2,2698.82 4560.2,2691.32 4570.2,2691.32 4570.2,2698.82 4570.2,2706.32 4580.2,2706.32 4580.2,2698.82 4580.2,2691.32 4590.2,2691.32 4590.2,2698.82 4590.2,2706.32 4600.2,2706.32 4600.2,2698.82 4600.2,2691.32 4610.2,2691.32 4610.2,2698.82 4610.2,2706.32 4620.2,2706.32 4620.2,2698.82 4620.2,2691.32 4630.2,2691.32 4630.2,2698.82 4630.2,2706.32 4640.2,2706.32 4640.2,2698.82 4640.2,2691.32 4650.2,2691.32 4650.2,2698.82 4650.2,2706.32 4660.2,2706.32 4660.2,2698.82 4660.2,2691.32 4670.2,2691.32 4670.2,2698.82 4675.2,2698.82 4687.99,2698.82 4724.41,2662.4 U2.F9@4724.41,2649.61
RAS#: U1.J13 U2.F7 | length 1374.8
  L1 w5: U1.J13@3976.38,2618.11 v1(3996.06,2598.43) ; U2.F7@4787.4,2649.61 v1(4811.01,2625.98)
  L4 w5: v1(3996.06,2598.43) 4059.33,2598.43 4067.96,2589.79 4081.63,2589.79 4090.26,2598.43 4104.33,2598.43 4109.33,2598.43 4109.33,2603.43 4119.33,2603.43 4119.33,2598.43 4119.33,2593.43 4129.33,2593.43 4129.33,2598.43 4129.33,2603.43 4139.33,2603.43 4139.33,2598.43 4139.33,2593.43 4149.33,2593.43 4149.33,2598.43 4149.33,2603.43 4159.33,2603.43 4159.33,2598.43 4159.33,2593.43 4169.33,2593.43 4169.33,2598.43 4169.33,2603.43 4179.33,2603.43 4179.33,2598.43 4179.33,2593.43 4189.33,2593.43 4189.33,2598.43 4189.33,2603.43 4199.33,2603.43 4199.33,2598.43 4199.33,2593.43 4209.33,2593.43 4209.33,2598.43 4209.33,2603.43 4219.33,2603.43 4219.33,2598.43 4219.33,2593.43 4229.33,2593.43 4229.33,2598.43 4229.33,2603.43 4239.33,2603.43 4239.33,2598.43 4239.33,2593.43 4249.33,2593.43 4249.33,2598.43 4249.33,2603.43 4259.33,2603.43 4259.33,2598.43 4259.33,2593.43 4269.33,2593.43 4269.33,2598.43 4269.33,2603.43 4279.33,2603.43 4279.33,2598.43 4279.33,2593.43 4289.33,2593.43 4289.33,2598.43 4289.33,2603.43 4299.33,2603.43 4299.33,2598.43 4299.33,2593.43 4309.33,2593.43 4309.33,2598.43 4309.33,2603.43 4319.33,2603.43 4319.33,2598.43 4319.33,2593.43 4329.33,2593.43 4329.33,2598.43 4329.33,2603.43 4339.33,2603.43 4339.33,2598.43 4339.33,2593.43 4349.33,2593.43 4349.33,2598.43 4349.33,2603.43 4359.33,2603.43 4359.33,2598.43 4359.33,2593.43 4369.33,2593.43 4369.33,2598.43 4369.33,2603.43 4379.33,2603.43 4379.33,2598.43 4379.33,2593.43 4389.33,2593.43 4389.33,2598.43 4389.33,2603.43 4399.33,2603.43 4399.33,2598.43 4399.33,2593.43 4409.33,2593.43 4409.33,2598.43 4409.33,2603.43 4419.33,2603.43 4419.33,2598.43 4419.33,2593.43 4429.33,2593.43 4429.33,2598.43 4429.33,2603.43 4439.33,2603.43 4439.33,2598.43 4439.33,2593.43 4449.33,2593.43 4449.33,2598.43 4449.33,2603.43 4459.33,2603.43 4459.33,2598.43 4459.33,2593.43 4469.33,2593.43 4469.33,2598.43 4469.33,2603.43 4479.33,2603.43 4479.33,2598.43 4479.33,2593.43 4489.33,2593.43 4489.33,2598.43 4489.33,2603.43 4499.33,2603.43 4499.33,2598.43 4499.33,2593.43 4509.33,2593.43 4509.33,2598.43 4509.33,2603.43 4519.33,2603.43 4519.33,2598.43 4519.33,2593.43 4529.33,2593.43 4529.33,2598.43 4529.33,2603.43 4539.33,2603.43 4539.33,2598.43 4539.33,2593.43 4549.33,2593.43 4549.33,2598.43 4549.33,2603.43 4559.33,2603.43 4559.33,2598.43 4559.33,2593.43 4569.33,2593.43 4569.33,2598.43 4569.33,2603.43 4579.33,2603.43 4579.33,2598.43 4579.33,2593.43 4589.33,2593.43 4589.33,2598.43 4595.47,2598.43 4744.38,2598.43 4768,2622.05 4807.08,2622.05 v1(4811.01,2625.98)
V0: U1.B4 U1.B9 U1.B13 U1.D7 U1.D10 | length 143.1
  L1 w5: v1(3602.36,2874.02) U1.B4@3622.05,2893.7 ; v1(3720.47,2834.65) U1.D7@3740.16,2814.96 ; U1.B9@3818.9,2893.7 v1(3838.58,2874.02) ; v1(3838.58,2838.58) 3858.27,2818.9 U1.D10@3858.27,2814.96 ; v1(3956.69,2913.39) U1.B13@3976.38,2893.7
V1: U1.D15 U1.G13 U1.J15 U1.K13 U1.N15 U1.R13 U2.A1 U2.E1 U2.E9 U2.H9 U2.L1 | length 276.9
  L1 w5: v1(3956.69,2598.43) U1.K13@3976.38,2578.74 ; U1.R13@3976.38,2381.89 3988.19,2370.08 v1(3996.06,2370.08) ; U1.G13@3976.38,2696.85 3980.3,2696.85 3996.06,2712.61 v1(3996.06,2716.54) ; U1.N15@4055.12,2460.63 4062.98,2460.63 v1(4074.8,2448.81) ; U1.J15@4055.12,2618.11 4062.98,2618.11 v1(4074.8,2606.29) ; U1.D15@4055.12,2814.96 v1(4074.8,2834.65) ; v1(4700.79,2618.11) U2.E9@4724.41,2618.11 ; v1(4700.79,2720.47) 4708.66,2712.6 U2.H9@4724.41,2712.6 ; U2.A1@4976.38,2492.13 v1(4992.13,2507.87) ; U2.E1@4976.38,2618.11 v1(4992.13,2633.86) ; U2.L1@4976.38,2807.09 v1(4992.13,2822.83)
V2: U1.N7 U1.N10 U1.R4 U1.R8 | length 83.5
  L1 w5: U1.N7@3740.16,2460.63 v1(3759.84,2440.94) ; v1(3759.84,2401.57) U1.R8@3779.53,2381.89 ; U1.N10@3858.27,2460.63 v1(3877.95,2440.94)
V3: U1.D2 U1.G4 U1.J2 U1.K4 U1.N2 | length 139.2
  L1 w5: U1.N2@3543.31,2460.63 v1(3562.99,2440.94) ; U1.J2@3543.31,2618.11 v1(3562.99,2598.43) ; U1.D2@3543.31,2814.96 v1(3562.99,2834.65) ; v1(3602.36,2598.43) U1.K4@3622.05,2578.74 ; v1(3602.36,2716.54) U1.G4@3622.05,2696.85
V3A: U2.A9 U2.C1 U2.C3 U2.C7 U2.C9 | length 119.2
  L1 w5: v1(4700.79,2555.12) U2.C9@4724.41,2555.12 ; v1(4708.66,2480.32) 4720.47,2492.13 U2.A9@4724.41,2492.13 ; U2.C7@4787.4,2555.12 v1(4803.15,2570.87) ; v1(4893.7,2570.87) 4904.12,2570.87 4916.63,2558.36 U2.C3@4913.39,2555.12 ; v1(4963.44,2569.74) 4963.44,2568.06 U2.C1@4976.38,2555.12
VAUX: U1.E5 U1.F8 U1.F11 U1.G10 U1.H6 U1.J10 U1.L6 U1.L9 | length 222.7
  L1 w5: U1.E5@3661.42,2775.59 v1(3681.1,2755.91) ; v1(3681.1,2677.17) U1.H6@3700.79,2657.48 ; U1.L6@3700.79,2539.37 v1(3720.47,2559.06) ; v1(3759.84,2755.91) U1.F8@3779.53,2736.22 ; U1.L9@3818.9,2539.37 v1(3838.58,2519.68) ; U1.J10@3858.27,2618.11 v1(3877.95,2598.43) ; U1.G10@3858.27,2696.85 v1(3877.95,2677.17) ; v1(3877.95,2755.91) U1.F11@3897.64,2736.22
VINT: U1.G7 U1.G9 U1.H8 U1.H10 U1.J7 U1.J9 U1.K8 U1.K10 | length 278.4
  L1 w5: U1.J7@3740.16,2618.11 v1(3759.84,2637.8) U1.H8@3779.53,2657.48 v1(3799.21,2677.17) U1.G9@3818.9,2696.85 ; U1.G7@3740.16,2696.85 v1(3759.84,2716.54) ; U1.K8@3779.53,2578.74 v1(3799.21,2598.43) ; v1(3799.21,2598.43) U1.J9@3818.9,2618.11 v1(3838.58,2637.8) U1.H10@3858.27,2657.48 ; v1(3838.58,2559.06) U1.K10@3858.27,2578.74
WE#: U1.E15 U2.F3 | length 1502
  L1 w5: U1.E15@4055.12,2775.59 4069.51,2789.98 4117.58,2789.98 4127.04,2780.51 4132.04,2780.51 4142.04,2780.51 4142.04,2775.51 4152.04,2775.51 4152.04,2780.51 4152.04,2785.51 4162.04,2785.51 4162.04,2780.51 4162.04,2775.51 4172.04,2775.51 4172.04,2780.51 4172.04,2785.51 4182.04,2785.51 4182.04,2780.51 4182.04,2775.51 4192.04,2775.51 4192.04,2780.51 4192.04,2785.51 4202.04,2785.51 4202.04,2780.51 4202.04,2775.51 4212.04,2775.51 4212.04,2780.51 4212.04,2785.51 4222.04,2785.51 4222.04,2780.51 4222.04,2775.51 4232.04,2775.51 4232.04,2780.51 4232.04,2785.51 4242.04,2785.51 4242.04,2780.51 4252.04,2780.51 4252.04,2785.51 4262.04,2785.51 4262.04,2780.51 4272.04,2780.51 4272.04,2785.51 4282.04,2785.51 4282.04,2780.51 4292.04,2780.51 4292.04,2785.51 4302.04,2785.51 4302.04,2780.51 4312.04,2780.51 4312.04,2785.51 4322.04,2785.51 4322.04,2780.51 4332.04,2780.51 4332.04,2785.51 4342.04,2785.51 4342.04,2780.51 4352.04,2780.51 4352.04,2785.51 4362.04,2785.51 4362.04,2780.51 4372.04,2780.51 4372.04,2785.51 4382.04,2785.51 4382.04,2780.51 4392.04,2780.51 4392.04,2785.51 4402.04,2785.51 4402.04,2780.51 4412.04,2780.51 4412.04,2785.51 4422.04,2785.51 4422.04,2780.51 4432.04,2780.51 4436.02,2780.51 4623.03,2780.51 4708.98,2866.46 5000.12,2866.46 5035.75,2830.83 5035.75,2705.04 4994.9,2664.19 4927.97,2664.19 U2.F3@4913.39,2649.61
pads on no net: U1.A2 U1.A3 U1.A4 U1.A5 U1.A6 U1.A7 U1.A8 U1.A9 U1.A10 U1.A11 U1.A12 U1.A13 U1.A14 U1.A15 U1.B1 U1.B2 U1.B3 U1.B5 U1.B6 U1.B8 U1.B10 U1.B12 U1.B14 U1.B16 U1.C1 U1.C2 U1.C3 U1.C4 U1.C5 U1.C6 U1.C7 U1.C8 U1.C9 U1.C10 U1.C11 U1.C12 U1.C13 U1.C14 U1.D1 U1.D3 U1.D5 U1.D6 U1.D8 U1.D9 U1.D11 U1.D12 U1.E1 U1.E2 U1.E3 U1.E4 U1.E6 U1.E7 U1.E8 U1.E10 U1.E11 U1.E12 U1.E13 U1.E14 U1.F1 U1.F2 U1.F3 U1.F4 U1.F5 U1.F6 U1.F7 U1.F9 U1.F10 U1.F12 U1.G1 U1.G3 U1.G5 U1.G6 U1.H1 U1.H2 U1.H3 U1.H4 U1.H5 U1.J1 U1.J3 U1.J4 U1.J6 U1.K1 U1.K2 U1.K3 U1.K5 U1.K6 U1.K12 U1.L1 U1.L3 U1.L4 U1.L5 U1.L7 U1.L8 U1.L10 U1.L11 U1.L12 U1.L13 U1.M1 U1.M2 U1.M3 U1.M4 U1.M5 U1.M6 U1.M7 U1.M9 U1.M10 U1.M11 U1.M12 U1.M13 U1.M14 U1.N1 U1.N3 U1.N4 U1.N5 U1.N6 U1.N8 U1.N9 U1.N11 U1.N12 U1.P1 U1.P2 U1.P4 U1.P5 U1.P6 U1.P7 U1.P8 U1.P9 U1.P10 U1.P11 U1.P12 U1.P13 U1.P14 U1.P15 U1.P16 U1.R1 U1.R2 U1.R3 U1.R5 U1.R7 U1.R9 U1.R11 U1.R12 U1.R14 U1.R15 U1.R16 U1.T2 U1.T3 U1.T4 U1.T5 U1.T6 U1.T7 U1.T8 U1.T9 U1.T10 U1.T11 U1.T12 U1.T13 U1.T14 U1.T15 U2.A2 U2.E2 U2.L3 U2.L7

## Polygon pours and split planes (outlines as drawn)
V0 on L3 "Bottom Layer-No Net" (solid, remove dead copper, pour order 21): 3503.94,2933.07 3641.73,2795.28 3937.01,2795.28 4074.8,2933.07
V3 on L3 "Bottom Layer-No Net" (solid, remove dead copper, pour order 17): 3503.94,2342.52 3503.94,2933.07 3641.73,2795.28 3641.73,2480.32 3503.94,2342.52
V2 on L3 "Bottom Layer-No Net" (solid, remove dead copper, pour order 13): 3503.94,2342.52 3641.73,2480.32 3937.01,2480.32 4074.8,2342.52
VINT on L3 "Bottom Layer-No Net" (solid, remove dead copper, pour order 8): 3740.16,2736.22 3740.16,2539.37 3858.27,2539.37 3858.27,2736.22 3740.16,2736.22
VAUX on L3 "Bottom Layer-No Net" (solid, remove dead copper, pour order 9): 3641.73,2795.28 3641.73,2480.32 3937.01,2480.31 3937.01,2795.28
V1 on L3 "Bottom Layer-No Net" (solid, remove dead copper, pour order 7): 3910.93,2403.05 4006.89,2307.09 5064.96,2307.09 5064.96,2968.5 4069.88,2968.5 3937.01,2835.63 3937.01,2501.36 3910.93,2473.43
GND on L2 "Bottom Layer-No Net" (solid, remove dead copper, pour order 11): 3346.46,3188.98 3346.46,2204.72 5078.74,2204.72 5078.74,3188.98 3346.46,3188.98

## Keep-outs
L1:
  lines w10: 4125.98,2618.11 4153.54,2590.55 4677.17,2590.55 ; 4133.86,2677.17 4645.67,2677.17 ; 4143.7,2395.67 4157.48,2381.89 4854.33,2381.89 ; 4149.61,2440.94 4669.29,2440.94 4692.91,2464.57